# Altium PCB UCC28180-Controller.PcbDoc
Units mil, origin at the board's own origin, x right, y up, seen from the top; angles counter-clockwise.
Board outline 1574.8 x 1100 mil, 2 copper layers (Top Layer, Bottom Layer); 20 components, 10 nets, 50 pads, 1 vias.
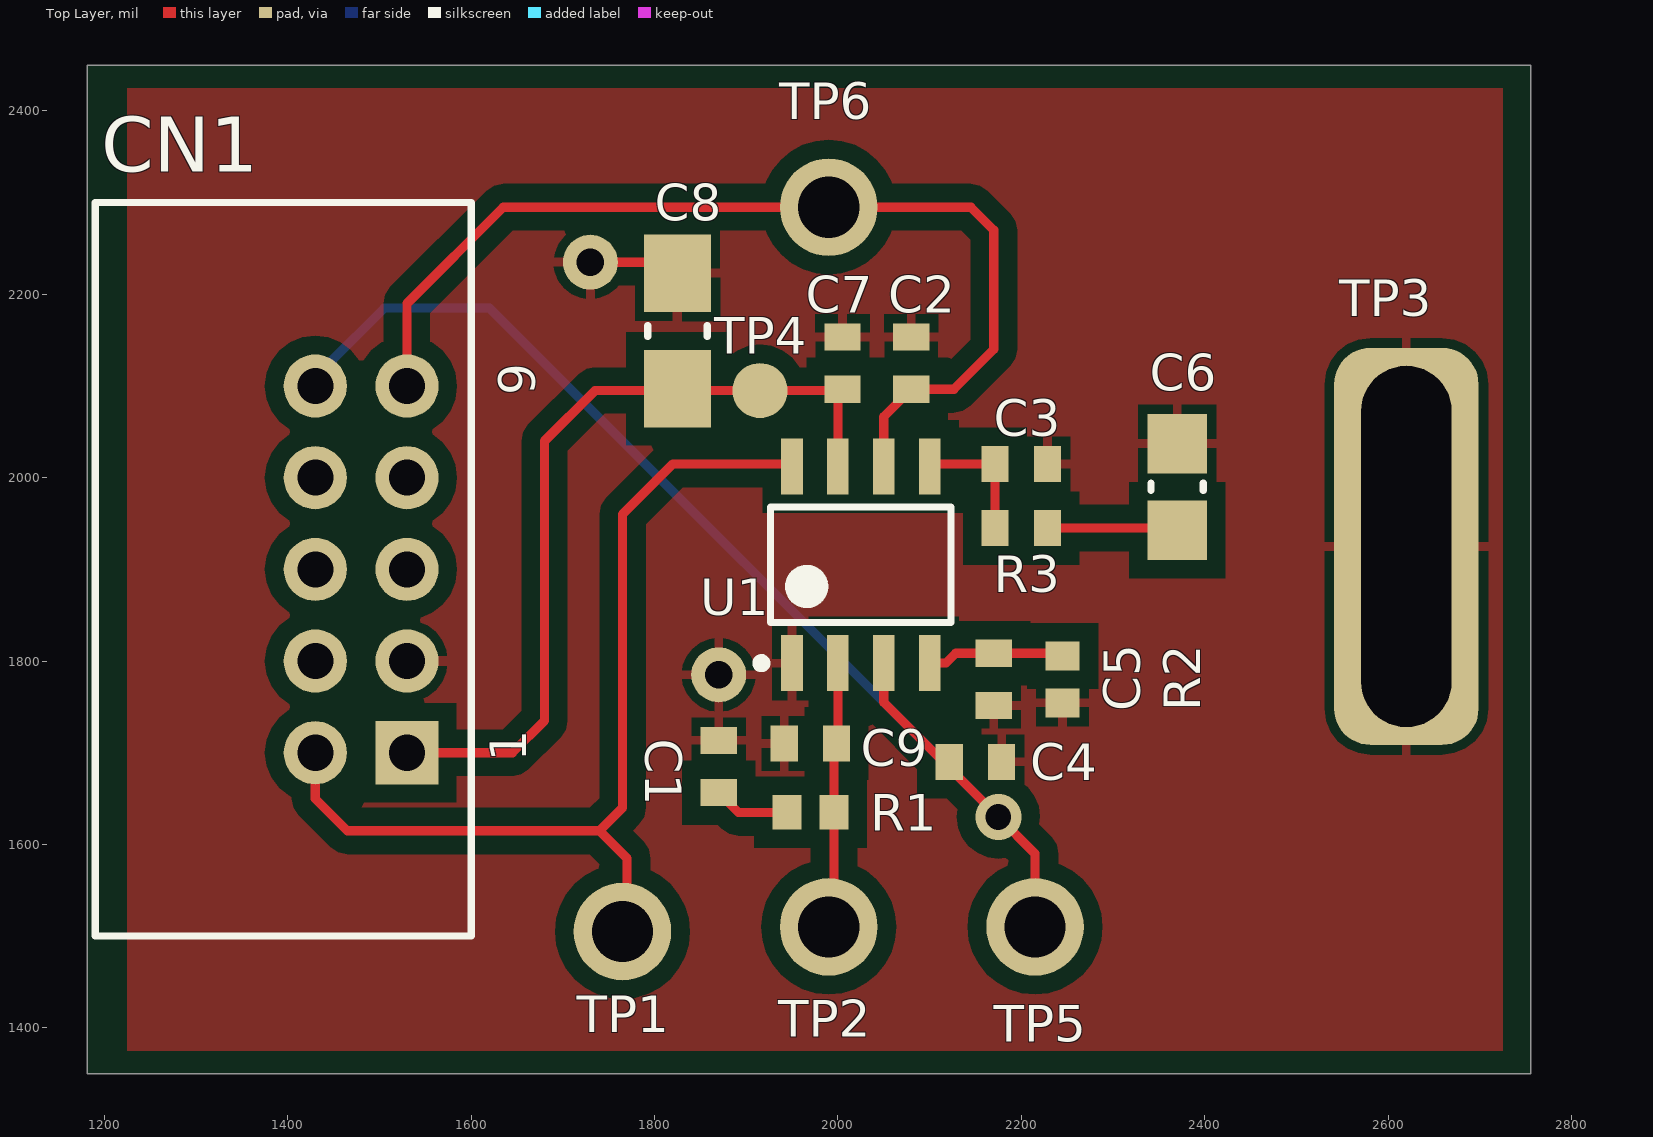
[diagram p0: Top Layer view]
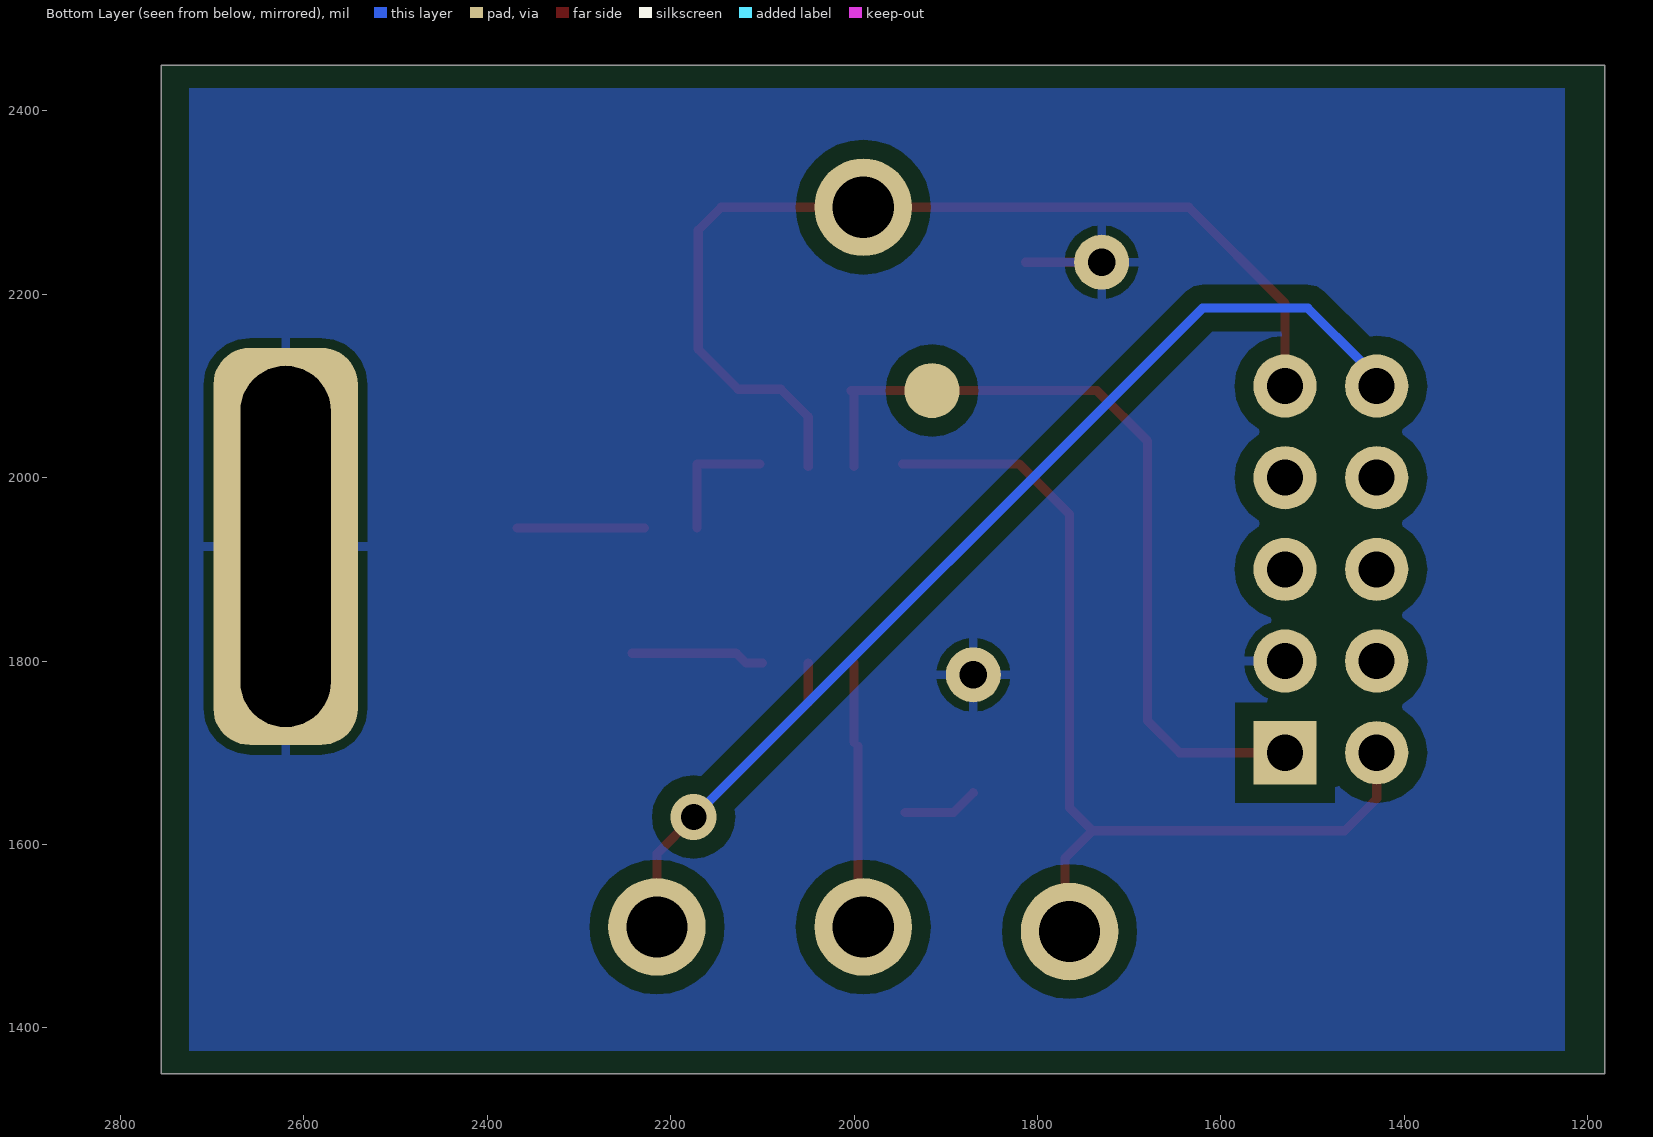
[diagram p1: Bottom Layer view, seen from below]

## Layer stack, top to bottom
Top Solder: solder mask 0.4, Solder Resist, Dk 3.5
Top Layer: signal copper 1.4
Dielectric 1: dielectric 12.6, FR-4, Dk 4.8
Bottom Layer: signal copper 1.4
Bottom Solder: solder mask 0.4, Solder Resist, Dk 3.5

## Board outline
1181.1,1350 2755.91,1350 2755.91,2450 1181.1,2450

## Design rules (kind name [scope] priority, off if disabled: settings)
Clearance [All] p1: gap=10 except(20: Arc-Poly Track-Poly SMDPad-Poly THPad-Poly Via-Poly)
PolygonConnect [All] p1: connectstyle=Relief reliefconductorwidth=10 reliefentries=4 polygonreliefangle="90 Angle" airgapwidth=10
RoutingVias [All] p1: holewidth=28 width=50 viastyle="Through Hole" minholewidth=28 minwidth=50 maxholewidth=28 maxwidth=50
SolderMaskExpansion [All] p1: expansion=4
Width [All] p1: maxlimit=200 minlimit=10 preferedwidth=10 minimp=50.000000 maximp=50.000000 favimp=50.000000
30 further rules are at their usual default settings.

## Components (designator, comment, footprint, x,y, rotation, side; value= is the part's Value field where it differs from the comment)
C1 "C0603--" CAP0603 1870,1685 r270 top
C2 "C0603C821K5RACTU" CAP0603 2080,2125 r270 top
C3 "C0603C474K4RACTU" CAP0603 2200,2015 r180 top
C4 "06031C102KAT2A" CAP0603 2150,1690 r180 top
C5 "C0603--" CAP0603 2170,1780 r90 top
C6 "GRM21BR71A475KA73L" CAP0805 2370,1990 r270 top
C7 "06035C104KAT2A" CAP0603 2005,2125 r90 top
C8 "GRM32RR71H105KA01K" CAP1206 1825,2160 r270 top
C9 "GRM188R71H272KA01D" CAP0603 1970,1710 r0 top
CN1 "MHR10N-ND" 3M15452 1530,1700 r90 top
R1 "CRCW0603--" RES0603 1970,1635 r180 top
R2 "CRCW060317K4FKEB" RES0603 2245,1780 r270 top
R3 "CRCW060322K6FKEA" CAP0603 2200,1945 r0 top
TP1 "5006" "Test Point" 1765,1505 r0 top
TP2 "5006" "Test Point" 1990,1510 r0 top
TP3 "TP-Slot" TP-Slot 2620,1925 r90 top
TP4 "TP-SM" TP-SM 1915,2095 r90 top
TP5 "5006" "Test Point" 2215,1510 r0 top
TP6 "5006" "Test Point" 1990,2295 r0 top
U1 "UCC28180DR" SOP127P600X175-8N 2025,1905 r90 top

## Footprints (in the part's own frame and the unit in brackets; to place one, negate y for a bottom-side part, rotate by r counter-clockwise, add the part's x,y. Pads: shape width x height; smd on the part's side, far side on the other; paste and mask are expansions set on the pad)
3M15452 [mm] "CONN HEADER 10POS DL R/A GOLD"
  rect 1.75x1.75 hole 1: 1(0,0)
  round 1.75 hole 1: 2(0,2.54) 3(2.54,0) 4(2.54,2.54) 5(5.08,0) 6(5.08,2.54) 7(7.62,0) 8(7.62,2.54) 9(10.16,0) 10(10.16,2.54)
  silkscreen extent -5.08,-1.78 15.24,8.64
CAP0603 [mm]
  rect 0.75x1 smd: 1(-0.725,0) 2(0.725,0)
  body extent -0.87,-0.48 0.87,0.47, height 0.5
CAP0805 [mm] "Ceramic Capacitor"
  rect 1.65x1.65 smd: 1(-1.2,0) 2(1.2,0)
  silkscreen extent -0.1,-0.72 0.1,0.72, body extent -1.6,-0.76 1.6,0.76, height 2
CAP1206 [mm] "Ceramic Capacitor"
  rect 2.15x1.85 smd: 1(-1.6,0) 2(1.6,0)
  silkscreen extent -0.15,-0.82 0.15,0.82, body extent -2.25,-0.86 2.25,0.86, height 2
RES0603 [mm]
  rect 0.8x0.95 smd: 1(-0.65,0) 2(0.65,0)
  body extent -0.83,-0.48 0.82,0.48, height 0.5
SOP127P600X175-8N [mm] "SOP, 8-Leads, Body 4.90x3.90mm, Pitch 1.27mm, IPC Medium Density"
  rect 1.55x0.6 smd: 1(-2.725,1.905) 2(-2.725,0.635) 3(-2.725,-0.635) 4(-2.725,-1.905) 5(2.725,-1.905) 6(2.725,-0.635) 7(2.725,0.635) 8(2.725,1.905)
  silkscreen extent -2.85,-2.5 1.6,2.88, body extent -2,-2.5 2,2.5, height 1.75
"Test Point" [mm] "Test Point"
  round 2.7 hole 1.7: 1(0,0)
  body extent -1.63,-1.5 1.55,1.68, height 5.49
TP-Slot [mm] "Special Test point-Slot"
  rrect50% 11x4 hole 2.5 slot 10 at 0 deg: 1(0,0)
TP-SM [mil] "Special Testpoint-Surface Mount"
  round 60 all layers, no hole: 1(0,0)

## Part data
C2: "CAP CER 820PF 50V X7R 0603"
C3: "CAP CER 0.47UF 16V X7R 0603"
C4: "CAP CER 1000PF 100V X7R 0603"
C6: "CAP CER 4.7UF 10V X7R 0805"
C7: "CAP CER 0.1UF 50V X7R 0603"
C8: "CAP CER 1UF 50V X7R 1210"
C9: "CAP CER 2700PF 50V X7R 0603"
CN1: "CONN HEADER 10PS R/A LONG LATCH"
R2: "RES SMD 17.4K OHM 1% 1/10W 0603"
R3: "RES SMD 22.6K OHM 1% 1/10W 0603"
TP1 TP2 TP5 TP6: "TEST POINT PC COMPACT .063\"D BLK"
U1: "IC PFC CTRLR AVERAGE CURR 8SOIC"

## Free pads (board coordinates)
  round 60 hole 30: 2(1730,2235) 3(1870,1785)

## Via types
v1: diameter 50, hole 28, Top Layer to Bottom Layer, 1 vias

## Nets (pads, with @x,y where several pads share a name; then routed paths per layer and width w, separated by ;. In a path a pad name is that pad's centre, name@x,y a point inside that pad or via, vN(x,y) a via of type N, cw(c..) or ccw(c..) an arc to the next point about the centre after c; other vN are vias at no path point)
GND: C1.1 C2.1 C3.1 C4.1 C5.1 C6.1 C7.2 C8.1 C9.1 CN1.3 pad.2 pad.3 R2.2 TP3.1 U1.1 | length 83
  Top Layer w10: pad.2 C8.1@1812.99,2235
GT_DRV: CN1.2 TP1.1 U1.8 | length 1048.7
  Top Layer w10: CN1.2@1446.06,1689.69 1430,1673.62 1430,1650 1465,1615 1740,1615 ; TP1.1@1770,1510 1770,1585 1740,1615 ; U1.8@1947.28,2015 1820,2015 1765,1960 1765,1640 1740,1615
I_FEEDBACK: C4.2 CN1.10 TP5.1 U1.3 | length 1365.9
  Top Layer w10: U1.3 2050,1755 v1(2175,1630) 2215,1590 TP5.1
  Bottom Layer w10: CN1.10@1445,2099.92 1445,2125 1505,2185 1620,2185 v1(2175,1630)
NetC1_2: C1.2 R1.2 | length 83.3
  Top Layer w10: C1.2 1891.46,1635 R1.2
NetC3_2: C3.2 R3.1 U1.5 | length 138.7
  Top Layer w10: U1.5@2102.72,2015 C3.2 R3.1
NetC6_2: C6.2 R3.2 | length 139.2
  Top Layer w10: R3.2 C6.2@2367.76,1945
NetC9_2: C9.2 R1.1 TP2.1 U1.2 | length 277.7
  Top Layer w10: TP2.1@1995.59,1515.59 R1.1 C9.2@1995.59,1707.05 ; C9.2@2000,1711.46 U1.2
SW_FREQ: C5.2 R2.1 U1.4 | length 146.5
  Top Layer w10: U1.4 2117.72,1797.72 2128.54,1808.54 C5.2 R2.1@2242.05,1808.54
V_FEEDBACK: C2.2 CN1.9 TP6.1 U1.6 | length 1114.8
  Top Layer w10: CN1.9@1545,2099.92 1530,2114.92 1530,2190 1635,2295 TP6.1 ; TP6.1@2000,2295 2145,2295 2170,2270 2170,2140 2126.46,2096.46 C2.2 2050,2066.46 U1.6
VCC: C7.1 C8.2 CN1.1 TP4.1 U1.7 | length 885
  Top Layer w10: CN1.1@1545,1699.92 1644.92,1699.92 1680,1735 1680,2040 1735,2095 TP4.1 2003.54,2095 2000,2091.46 U1.7
pads on no net: CN1.4 CN1.5 CN1.6 CN1.7 CN1.8

## Polygon pours and split planes (outlines as drawn)
GND on Top Layer "Top Layer-GND" (solid, pour order 0): 1225,2425 2725,2425 2725,1375 1225,1375 1225,2425
GND on Bottom Layer "Bottom Layer-GND" (solid, pour order 2): 1225,2425 1225,1375 2725,1375 2725,2425 1225,2425

## Silkscreen, mask and mechanical layers (free items; w line width, h text height)
Mechanical 2:
  the board outline again, w10

## Text inside footprints (layer, text, board x,y; h text height)
CN1: Top Overlay "1" at 1660,1690 h40 r90; Top Overlay "9" at 1670,2090 h40 r90